# EAGLE board Sensorenschakeling_PCB_v2.2 (EAGLE 9.7.0)
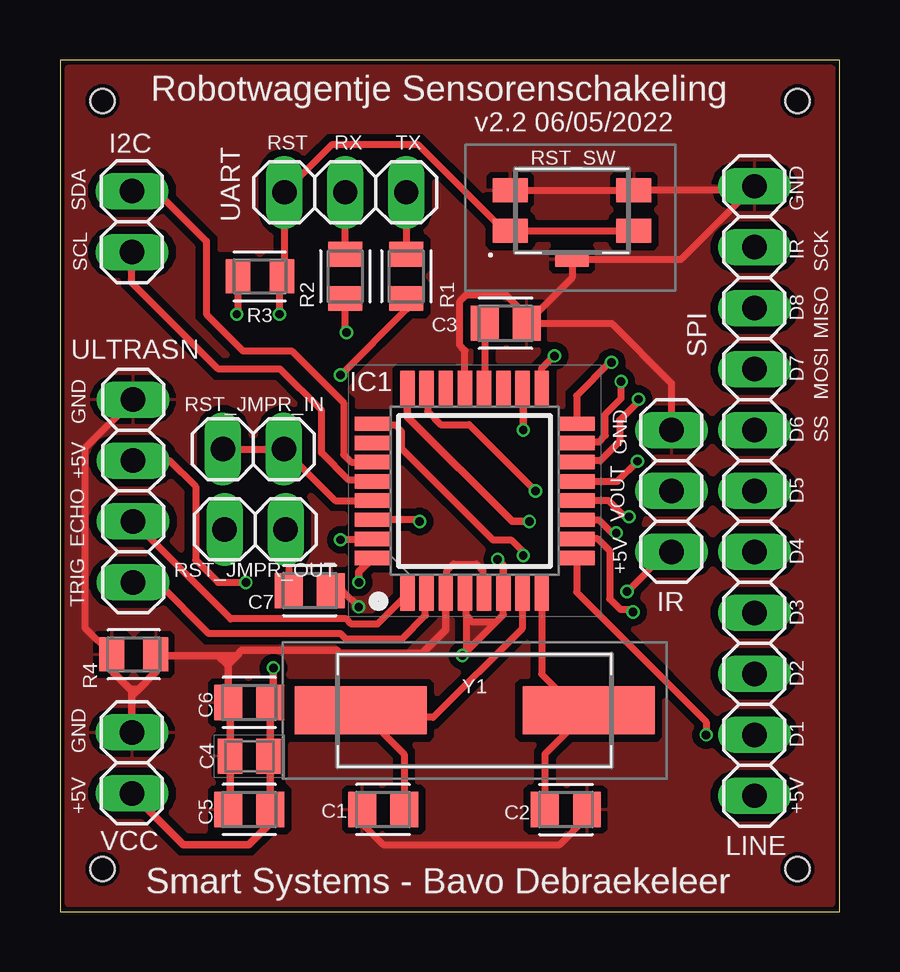
[diagram p0: board, top side]
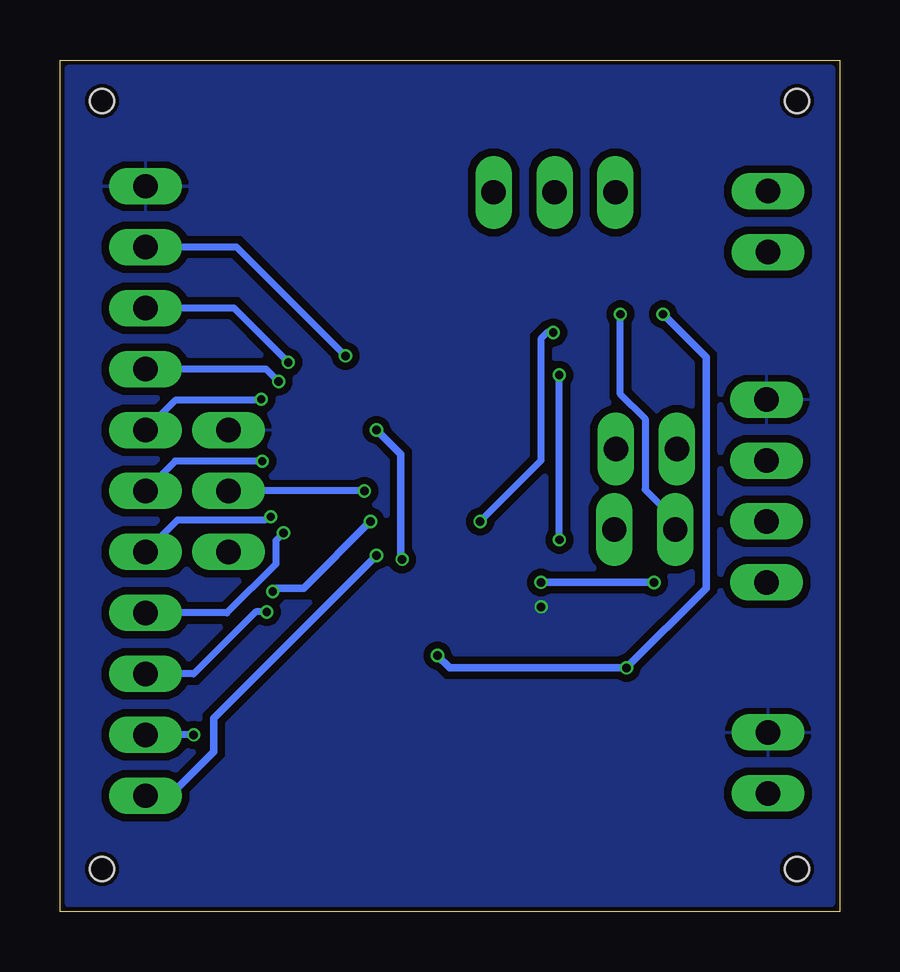
[diagram p1: board, bottom side, seen from below]

Size 32.49 x 35.48 mm. Coordinates in mm from the lower left corner, seen from the top.
Outline: 0,0 32.49,0 32.49,35.48 0,35.48 0,0
Copper layers (1*16): Top 0.035mm / dielectric 1.5mm / Bottom 0.035mm
Design rules "default *": minimum track width 0.3mm, minimum drill 0.35mm, track to track 0.3mm, track to pad 0.3mm, pad to pad 0.2mm, via to via 0.3mm, smd to smd 0.2mm, copper to edge 0.2mm, drill to drill 0.3mm, minimum pad ring 0.1mm, minimum via ring 0.1mm, stop-mask expansion 4mil, vias tented up to drill 0mil, thermal gap 10mil
Holes 1 mm at 30.73,33.78 30.73,1.78 1.78,33.78 1.78,1.78

## Footprints (pad centres in the part's own frame; a part is rotated, then mirrored left to right if it is on the bottom)
CAPC2012X110 = smd 1.165 x 1.465: 1 -0.875,0; 2 0.875,0
CAPC2012X145N = smd 1.02 x 1.47: 1 -0.8,0; 2 0.8,0
1X02 = drill 1.016 long: 1 -1.27,0; 2 1.27,0
QFP80P900X900X120-32N = smd 1.5 x 0.6: 1 -4.25,2.8; 2 -4.25,2; 3 -4.25,1.2; 4 -4.25,0.4; 5 -4.25,-0.4; 6 -4.25,-1.2; 7 -4.25,-2; 8 -4.25,-2.8; 17 4.25,-2.8; 18 4.25,-2; 19 4.25,-1.2; 20 4.25,-0.4; 21 4.25,0.4; 22 4.25,1.2; 23 4.25,2; 24 4.25,2.8 | smd 0.6 x 1.5: 9 -2.8,-4.25; 10 -2,-4.25; 11 -1.2,-4.25; 12 -0.4,-4.25; 13 0.4,-4.25; 14 1.2,-4.25; 15 2,-4.25; 16 2.8,-4.25; 25 2.8,4.25; 26 2,4.25; 27 1.2,4.25; 28 0.4,4.25; 29 -0.4,4.25; 30 -1.2,4.25; 31 -2,4.25; 32 -2.8,4.25
1X03 = drill 1.016 long: 1 -2.54,0; 2 0,0; 3 2.54,0
1X11 = drill 1.016 long: 1 -12.7,0; 2 -10.16,0; 3 -7.62,0; 4 -5.08,0; 5 -2.54,0; 6 0,0; 7 2.54,0; 8 5.08,0; 9 7.62,0; 10 10.16,0; 11 12.7,0
RESC2012X65 = smd 1.031 x 1.42: 1 -0.919,0; 2 0.919,0
EVQP2V02W = smd 1 x 1.45: 1 -0.85,2.575; 2 0.85,2.575; 3 -0.85,-2.575; 4 0.85,-2.575 | smd 0.65 x 1.4: 5 -2.025,0
1X04 = drill 1.016 long: 1 -3.81,0; 2 -1.27,0; 3 1.27,0; 4 3.81,0
HC49SM830506016ATF = smd 5.5 x 2: 1 -4.75,0; 2 4.75,0

## Placement (x,y rotation side)
C1  22pF  [CAPC2012X110]  13.46,4.25 0 top
C2  22pF  [CAPC2012X110]  21.08,4.25 180 top
C3  100nF  [CAPC2012X110]  18.57,24.51 0 top
C4  4.7uF_16V  [CAPC2012X145N]  7.89,6.48 0 top
C5  1uF  [CAPC2012X110]  7.89,4.25 0 top
C6  1uF  [CAPC2012X110]  7.89,8.71 0 top
C7  10uF  [CAPC2012X110]  10.41,13.38 180 top
I2C  [1X02]  3,28.75 270 top
IC1  ATMEGA328P-AN  [QFP80P900X900X120-32N]  17.27,17.53 90 top
IR  PINHD-1X3  [1X03]  25.48,17.53 90 top
LINE  PINHD-1X11  [1X11]  28.93,17.53 270 top
R1  1kΩ  [RESC2012X65]  14.43,26.47 90 top
R2  1kΩ  [RESC2012X65]  11.89,26.47 90 top
R3  1kΩ  [RESC2012X65]  8.33,26.47 180 top
R4  1kΩ  [RESC2012X65]  3.07,10.72 0 top
RST_JMPR_IN  [1X02]  8.06,19.27 0 top
RST_JMPR_OUT  [1X02]  8.13,15.92 0 top
RST_SW  EVQ-P2F02K  [EVQP2V02W]  21.34,29.21 90 top
UART  [1X03]  11.89,29.97 0 top
ULTRASN  PINHD-1X4  [1X04]  3.05,17.53 90 top
VCC  [1X02]  3,6.2 90 top
Y1  16MHz  [HC49SM830506016ATF]  17.27,8.38 180 top

## Library data of the parts
C1-C3 C5-C7 = Capacitor; CATEGORY: Capacitor
C4 = CC0805ZKY5V7BB475; ARROW_PART_NUMBER: CC0805ZKY5V7BB475; ARROW_PRICE-STOCK: https://www.arrow.com/en/products/cc0805zky5v7bb475/yageo; DESCRIPTION: YAGEO - CC0805ZKY5V7BB475 - SMD Multilayer Ceramic Capacitor, 4.7 F, 16 V, 0805 [2012 Metric], +80%, -20%, Y5V, CC Series; HEIGHT: 1.45mm; MANUFACTURER_NAME: KEMET; MANUFACTURER_PART_NUMBER: CC0805ZKY5V7BB475; MOUSER_PART_NUMBER: 603-CC805ZKY5V7BB475; MOUSER_PRICE-STOCK: https://www.mouser.co.uk/ProductDetail/Yageo/CC0805ZKY5V7BB475?qs=7s%252B3O6pAiyA4wtTM471wUA%3D%3D
I2C RST_JMPR_IN RST_JMPR_OUT UART VCC = pinhead
IC1 = ATMEGA328P-AN; ARROW_PART_NUMBER: ATMEGA328P-AN; ARROW_PRICE-STOCK: https://www.arrow.com/en/products/atmega328p-an/microchip-technology?region=nac; DESCRIPTION: MCU 8-bit ATmega AVR RISC 32KB Flash Atmel ATMEGA328P-AN, 8bit AVR Microcontroller, 20MHz, 32 kB Flash, 32-Pin TQFP; HEIGHT: 1.2mm; MANUFACTURER_NAME: Microchip; MANUFACTURER_PART_NUMBER: ATMEGA328P-AN; MOUSER_PART_NUMBER: 556-ATMEGA328P-AN; MOUSER_PRICE-STOCK: https://www.mouser.co.uk/ProductDetail/Microchip-Technology-Atmel/ATMEGA328P-AN?qs=6Dg1WZIWLC6WK556tw8xAw%3D%3D
IR LINE ULTRASN = Connector; CATEGORY: CONNECTOR; SUB-CATEGORY: PIN-HEADER
R1-R4 = Resistor; CATEGORY: Resistor; SUB-CATEGORY: Fixed
RST_SW = EVQ-P2F02K; DESCRIPTION: Tactile Switches Light Touch Switch 4.7x3.5mm SMD midd; HEIGHT: 2.5mm; MANUFACTURER_NAME: Panasonic; MANUFACTURER_PART_NUMBER: EVQ-P2F02K; MOUSER_PART_NUMBER: 667-EVQ-P2F02K; MOUSER_PRICE-STOCK: https://www.mouser.co.uk/ProductDetail/Panasonic/EVQ-P2F02K?qs=WwqriLBepZsV0QucKJ89rg%3D%3D
Y1 = HC49SM-8-30-50-60-16-ATF; DESCRIPTION: MULTICOMP - HC49SM-8-30-50-60-16-ATF - CRYSTAL, 8MHZ, 16PF, SMD; HEIGHT: 4mm; MANUFACTURER_NAME: MULTICOMP; MANUFACTURER_PART_NUMBER: HC49SM-8-30-50-60-16-ATF

## Nets
AREF: C3.1 IC1.20
D1: IC1.9 LINE.10
D2: IC1.10 LINE.9
D3: IC1.11 LINE.8
D4: IC1.12 LINE.7
D5: IC1.13 LINE.6
D6: IC1.14 LINE.5
D7: IC1.15 LINE.4
D8: IC1.16 LINE.3
ECHO: IC1.1 ULTRASN.2
GND: C1.1 C2.1 C3.2 C4.1 C5.1 C6.1 C7.1 IC1.3 IC1.5 IC1.21 IR.3 LINE.1 R4.1 R4.2 RST_SW.2 RST_SW.4 RST_SW.5 ULTRASN.4 VCC.2
IR: IC1.17 LINE.2
IR_ON/OFF: IC1.24 IR.1
LINE_ON/OFF: IC1.25 LINE.11
N$1: IC1.31 R1.1
N$2: IC1.30 R2.1
RST: IC1.29 RST_JMPR_IN.1 RST_JMPR_IN.2
RST_C: C7.2 RST_JMPR_OUT.2
RST_USB: R3.1 RST_JMPR_OUT.1 RST_SW.1 RST_SW.3 UART.1
RX: R2.2 UART.2
SCL: I2C.2 IC1.28
SDA: I2C.1 IC1.27
TOSC1: C1.2 IC1.7 Y1.2
TOSC2: C2.2 IC1.8 Y1.1
TRIG: IC1.2 ULTRASN.1
TX: R1.2 UART.3
ULTRASN_ON/OFF: IC1.32 ULTRASN.3
VCC: C4.2 C5.2 C6.2 IC1.4 IC1.6 IC1.18 R3.2 VCC.1
VOUT: IC1.23 IR.2

## Tracks (layer width: path | path; a pad name or v marks a point on that pad's centre or on a via)
AREF
  Top 0.3: C3.1 17.69,21.8 IC1.20
D1  (via drill 0.35)
  Top 0.3: IC1.9 21.52,13.31 26.92,7.91 v26.92,7.37
  Bottom 0.3: v26.92,7.37 LINE.10
D2  (via drill 0.35 pad 0.55)
  Top 0.3: v23.88,12.48 23.77,12.59 23.35,12.59 22.9,13.03 22.9,15.03 22.46,15.48 22.41,15.53 IC1.10
  Bottom 0.3: LINE.9 26.92,9.91 24.34,12.48 v23.88,12.48
D3  (via drill 0.35 pad 0.55)
  Top 0.3: v23.18,15.78 23,15.78 22.46,16.33 IC1.11
  Bottom 0.3: v23.18,15.78 23.5,15.46 23.5,14.48 25.54,12.45 LINE.8
D4  (via drill 0.35 pad 0.55)
  Top 0.3: v23.71,16.45 23.53,16.45 22.86,17.13 IC1.12
  Bottom 0.3: v23.71,16.45 23.82,16.45 23.96,16.31 27.61,16.31 LINE.7
D5  (via drill 0.35 pad 0.55)
  Top 0.3: IC1.13 23.22,17.93 v24.07,18.77
  Bottom 0.3: v24.07,18.77 27.69,18.77 LINE.6
D6  (via drill 0.35 pad 0.55)
  Top 0.3: IC1.14 21.57,18.78 22.51,18.78 23.32,19.59 23.32,20.48 23.98,21.14 23.98,21.22 v24.11,21.35
  Bottom 0.3: LINE.5 27.7,21.3 24.16,21.3 v24.11,21.35
D7  (via drill 0.35 pad 0.55)
  Top 0.3: v23.38,22.09 23.38,21.39 22.72,20.73 22.72,19.84 22.46,19.58 21.57,19.58 IC1.15
  Bottom 0.3: v23.38,22.09 23.9,22.61 LINE.4
D8  (via drill 0.35 pad 0.55)
  Top 0.3: v22.98,22.89 22.91,22.89 21.52,21.5 IC1.16
  Bottom 0.3: v22.98,22.89 25.24,25.15 LINE.3
ECHO
  Top 0.3: IC1.1 14.47,13.23 13.22,11.97 12.15,11.97 11.93,12.19 7.11,12.19 ULTRASN.2
GND  (via drill 0.35)
  Top 0.3: IR.3 25.48,22.02 22.99,24.51 C3.2 21.34,26.4 RST_SW.5 25.89,27.18 LINE.1 28.77,30.06 RST_SW.4 RST_SW.2 | ULTRASN.4 3.05,21.31 1.04,19.3 1.04,11.83 R4.1 | IC1.21 16.87,23.38 16.66,23.59 16.66,25.43 16.92,25.69 18.58,25.69 19.21,25.06 | C1.1 12.59,3.67 13.46,2.79 20.83,2.79 21.96,3.92 C2.1 | IC1.3 16.12,13.33 16.12,14.21 16.39,14.48 17.36,14.48 17.62,14.21 17.62,13.33 IC1.5 | C7.1 11.77,13.38 v12.45,12.7
  Top 0.305: 3.99,9.99 3.28,9.27 | 3.28,9.27 3,8.99 | VCC.2 3,8.99 | IC1.3 16.07,11.75 15.09,10.77 11.65,10.77 11.54,10.88 7.58,10.88 7.37,10.67 | 7.37,10.67 7.11,10.67 | 7.11,10.67 6.6,10.67 | 6.6,10.67 4.04,10.67 R4.2 3.99,9.99 | 3.99,9.99 3.99,9.98 | 2.21,10.67 R4.1 2.15,10.04 2.92,9.27 | 7.01,10.26 C6.1 7.09,8.64 C4.1 7.09,4.33 C5.1 | 7.01,10.26 7.01,10.57 7.11,10.67 | 7.01,10.26 6.99,10.29 | 6.99,10.29 6.6,10.67 | 6.99,10.29 7.37,10.67 | 3,8.99 3,9.2 2.92,9.27 | 2.92,9.27 3.28,9.27 | 17.62,13.32 IC1.5
  pour Top: -0.25,35.81 -0.25,-0.25 -0.51,-0.51 33.02,-0.51 33.02,35.81 32.77,36.07 0,36.07
  pour Bottom: -0.51,35.81 -0.51,-0.51 33.02,-0.51 33.02,35.81 32.77,36.07 -0.25,36.07
IR  (via drill 0.35 pad 0.55)
  Top 0.3: IC1.17 20.07,22.63 v20.6,23.16
  Bottom 0.3: v20.6,23.16 25.13,27.69 LINE.2
IR_ON/OFF  (via drill 0.35 pad 0.55)
  Top 0.3: v23.63,13.34 25.28,14.99 IR.1
  Top 0.305: IC1.24 14.47,20.62 18.84,16.26 v19.56,16.26
  Bottom 0.305: v23.63,13.34 23.48,13.48 22.34,13.48 v19.56,16.26
LINE_ON/OFF  (via drill 0.35 pad 0.55)
  Top 0.3: IC1.25 13.07,20.28 13.96,20.28 14.22,20.01 14.22,19.31 18.03,15.49 18.8,15.49 19.3,14.99 v19.3,14.84
  Bottom 0.305: LINE.11 27.92,4.83 26.09,6.66 26.09,8.05 v19.3,14.84
N$1  (via drill 0.35, 0.35 pad 0.55)
  Top 0.3: R1.1 14.43,25.09 v11.69,22.36 | IC1.31 12.99,15.49 v11.68,15.49
  Bottom 0.3: v11.68,15.49 v11.68,22.35 v11.69,22.36
N$2  (via drill 0.35, 0.35 pad 0.55)
  Top 0.3: v11.94,24.13 11.89,24.18 R2.1 | v14.99,16.26 14.92,16.33 IC1.30
  Bottom 0.3: v11.94,24.13 12.19,24.13 12.45,23.87 12.45,18.79 v14.99,16.26
RST
  Top 0.3: RST_JMPR_IN.1 RST_JMPR_IN.2 11.47,17.13 IC1.29
RST_C
  Top 0.3: RST_JMPR_OUT.2 9.53,15.79 C7.2
RST_USB  (via drill 0.35 pad 0.55)
  Top 0.3: RST_SW.3 RST_SW.1 18.52,28.36 14.93,31.95 11.32,31.95 UART.1 9.35,26.56 R3.1 9.14,26.36 v9.14,24.89
  Bottom 0.3: v9.14,24.89 9.14,21.57 8.12,20.54 8.12,17.58 6.86,16.32 RST_JMPR_OUT.1
RX
  Top 0.3: R2.2 UART.2
SCL
  Top 0.3: I2C.2 3,26.21 6.6,22.61 9.17,22.61 10.9,20.88 10.9,19.12 12.04,17.98 12.97,17.98 IC1.28
SDA
  Top 0.3: I2C.1 4.01,30.02 6.1,27.94 6.1,24.89 7.62,23.37 9.65,23.37 11.82,21.2 11.82,19.04 12.14,18.73 IC1.27
TOSC1
  Top 0.3: IC1.7 19.27,11.82 15.54,8.09 12.81,8.09 Y1.2 14.34,6.57 C1.2
TOSC2
  Top 0.3: Y1.1 21.81,8.17 | 21.81,8.17 20.21,6.57 C2.2 | IC1.8 20.07,9.9 21.81,8.17
TRIG
  Top 0.3: ULTRASN.1 4.06,13.72 6.19,11.59 11.68,11.59 11.9,11.38 14.26,11.38 15.22,12.34 15.22,13.23 IC1.2
TX
  Top 0.3: UART.3 R1.2
ULTRASN_ON/OFF  (via drill 0.35, 0.35 pad 0.55)
  Top 0.3: 7.62,13.72 6.59,13.72 5.65,14.66 5.65,17.72 4.57,18.8 ULTRASN.3
  Top 0.305: 7.62,13.72 v7.74,13.72 | IC1.32 12.45,14.15 v12.45,13.72
  Bottom 0.305: v7.74,13.72 v12.45,13.72
VCC  (via drill 0.35)
  Top 0.3: R3.2 7.41,24.94 v7.37,24.89 | IC1.4 16.92,13.23 16.92,12.34 | 16.92,12.34 17.19,12.08 18.17,12.08 | 18.17,12.08 18.47,12.38 IC1.6 | 18.17,12.08 v16.76,10.67 16.92,10.83 16.92,12.34
  Top 0.305: v19.3,20.07 19.3,21.74 IC1.18 | 8.76,6.4 C5.2 8.76,3.68 7.87,2.79 5.13,2.79 VCC.1 | 8.76,6.4 C4.2 | 8.76,6.4 C6.2 8.89,8.84 v8.89,10.16 | IC1.6 18.47,14.44 v18.23,14.68
  Bottom 0.305: v19.3,20.07 18.29,19.05 18.29,14.73 v18.23,14.68 | v16.76,10.67 16.26,10.16 v8.89,10.16 | v8.89,10.16 | v7.37,24.89 5.57,23.1 5.57,13.48 v8.89,10.16
  pour Top: 17.02,10.92 17.02,12.19 18.29,12.19
VOUT  (via drill 0.35 pad 0.55)
  Top 0.3: IC1.23 15.32,21.73 15.32,20.84 15.87,20.29 17.05,20.29 v19.81,17.53
  Bottom 0.3: v19.81,17.53 IR.2

## Text on the board
tNames: Robotwagentje Sensorenschakeling | v2.2 06/05/2022 | RST | RX | TX | SDA | GND | SCL | IR | SCK | D8 | MISO | SPI | D7 | MOSI | GND | D6 | SS | GND | +5V | D5 | VOUT | ECHO | +5V | D4 | TRIG | D3 | D2 | GND | D1 | +5V | +5V | Smart Systems - Bavo Debraekeleer